# Altium PCB PCB1.PcbDoc
Units mil, origin at the board's own origin, x right, y up, seen from the top; angles counter-clockwise.
Board outline 2425 x 2095 mil, 2 copper layers (Top Layer, Bottom Layer); 21 components, 11 nets, 50 pads, 0 vias.
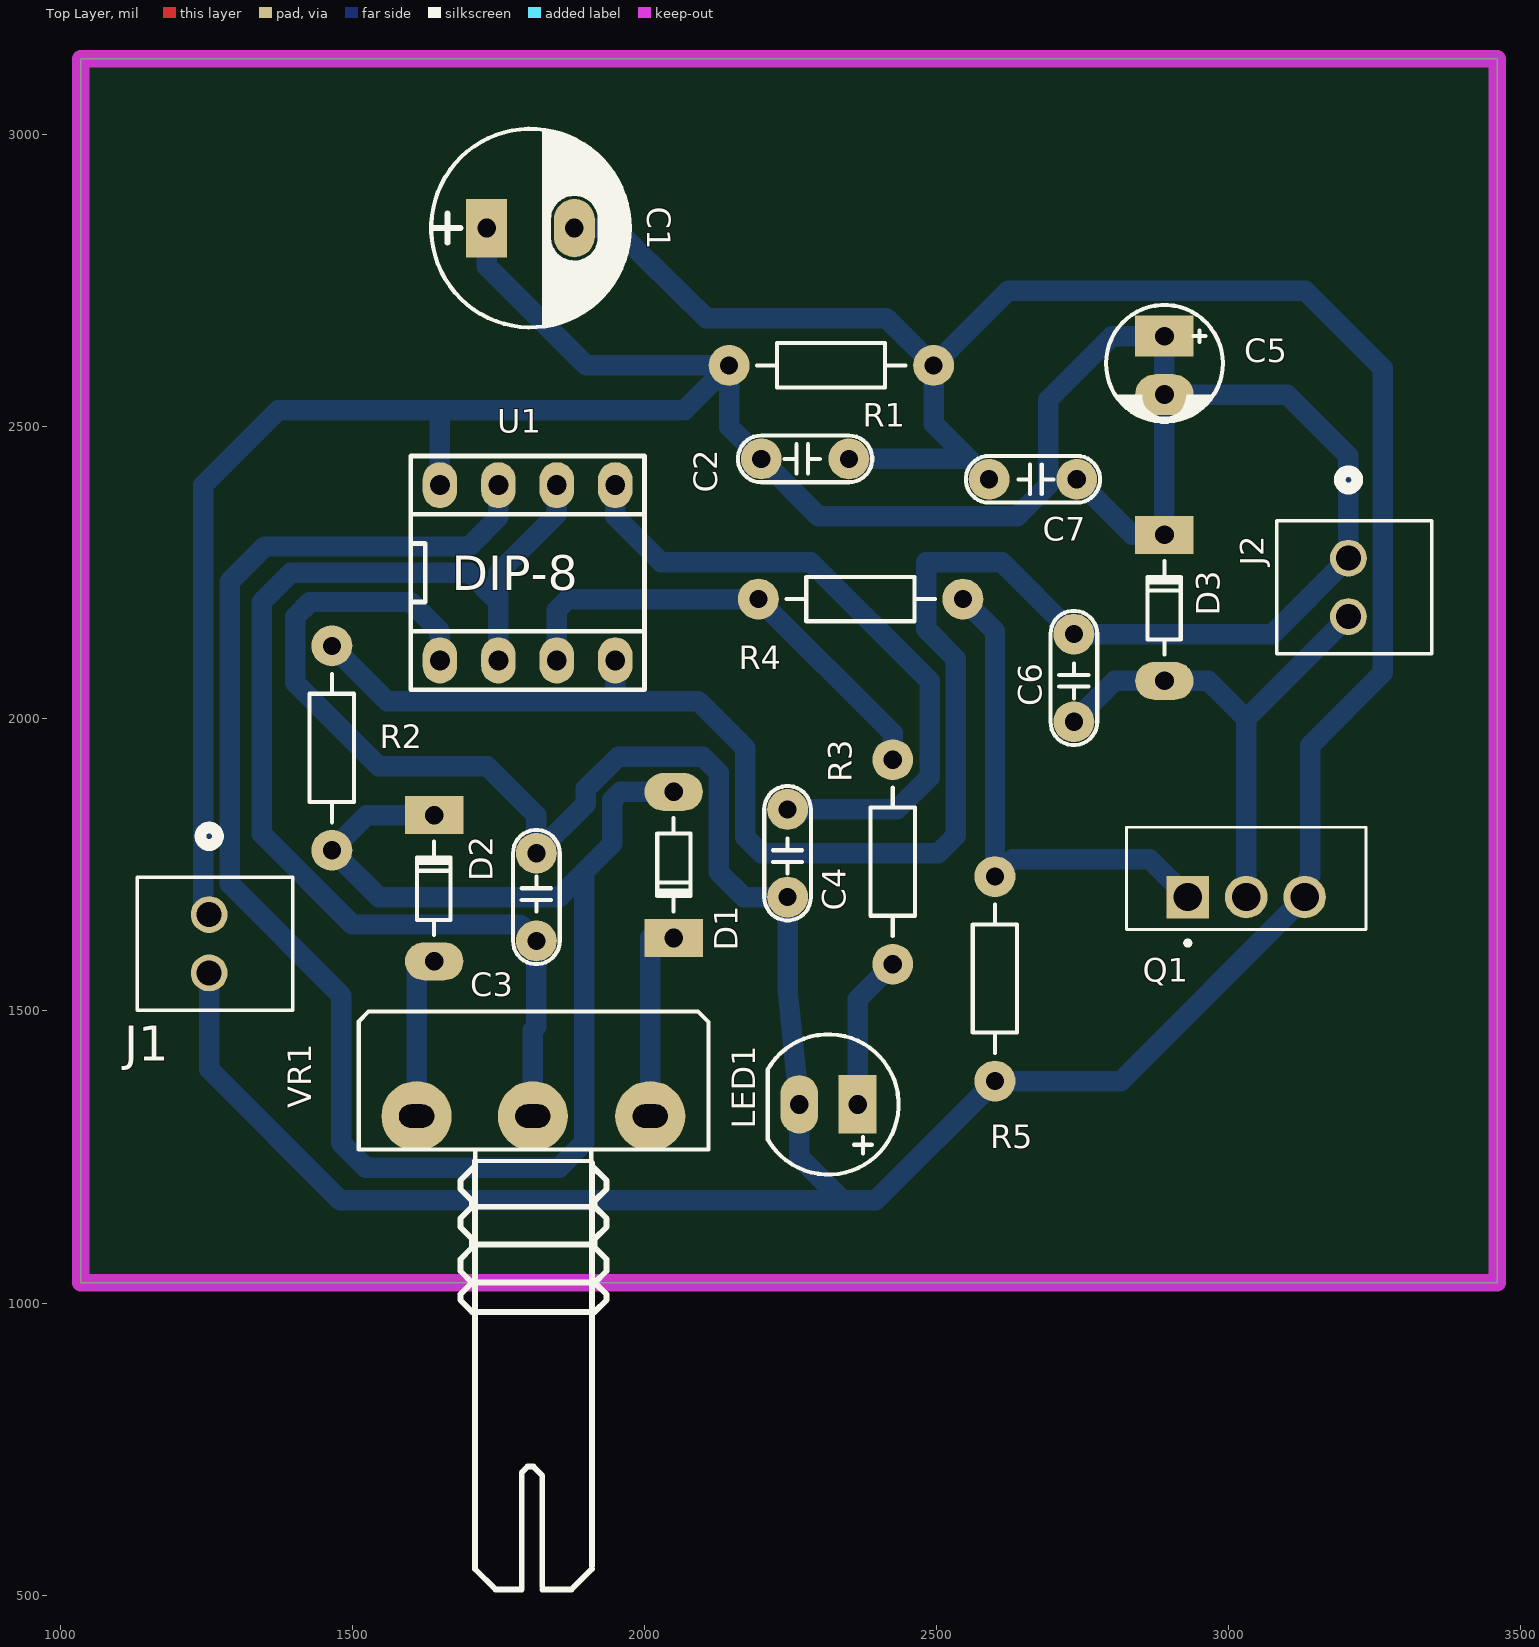
[diagram p0: Top Layer view]
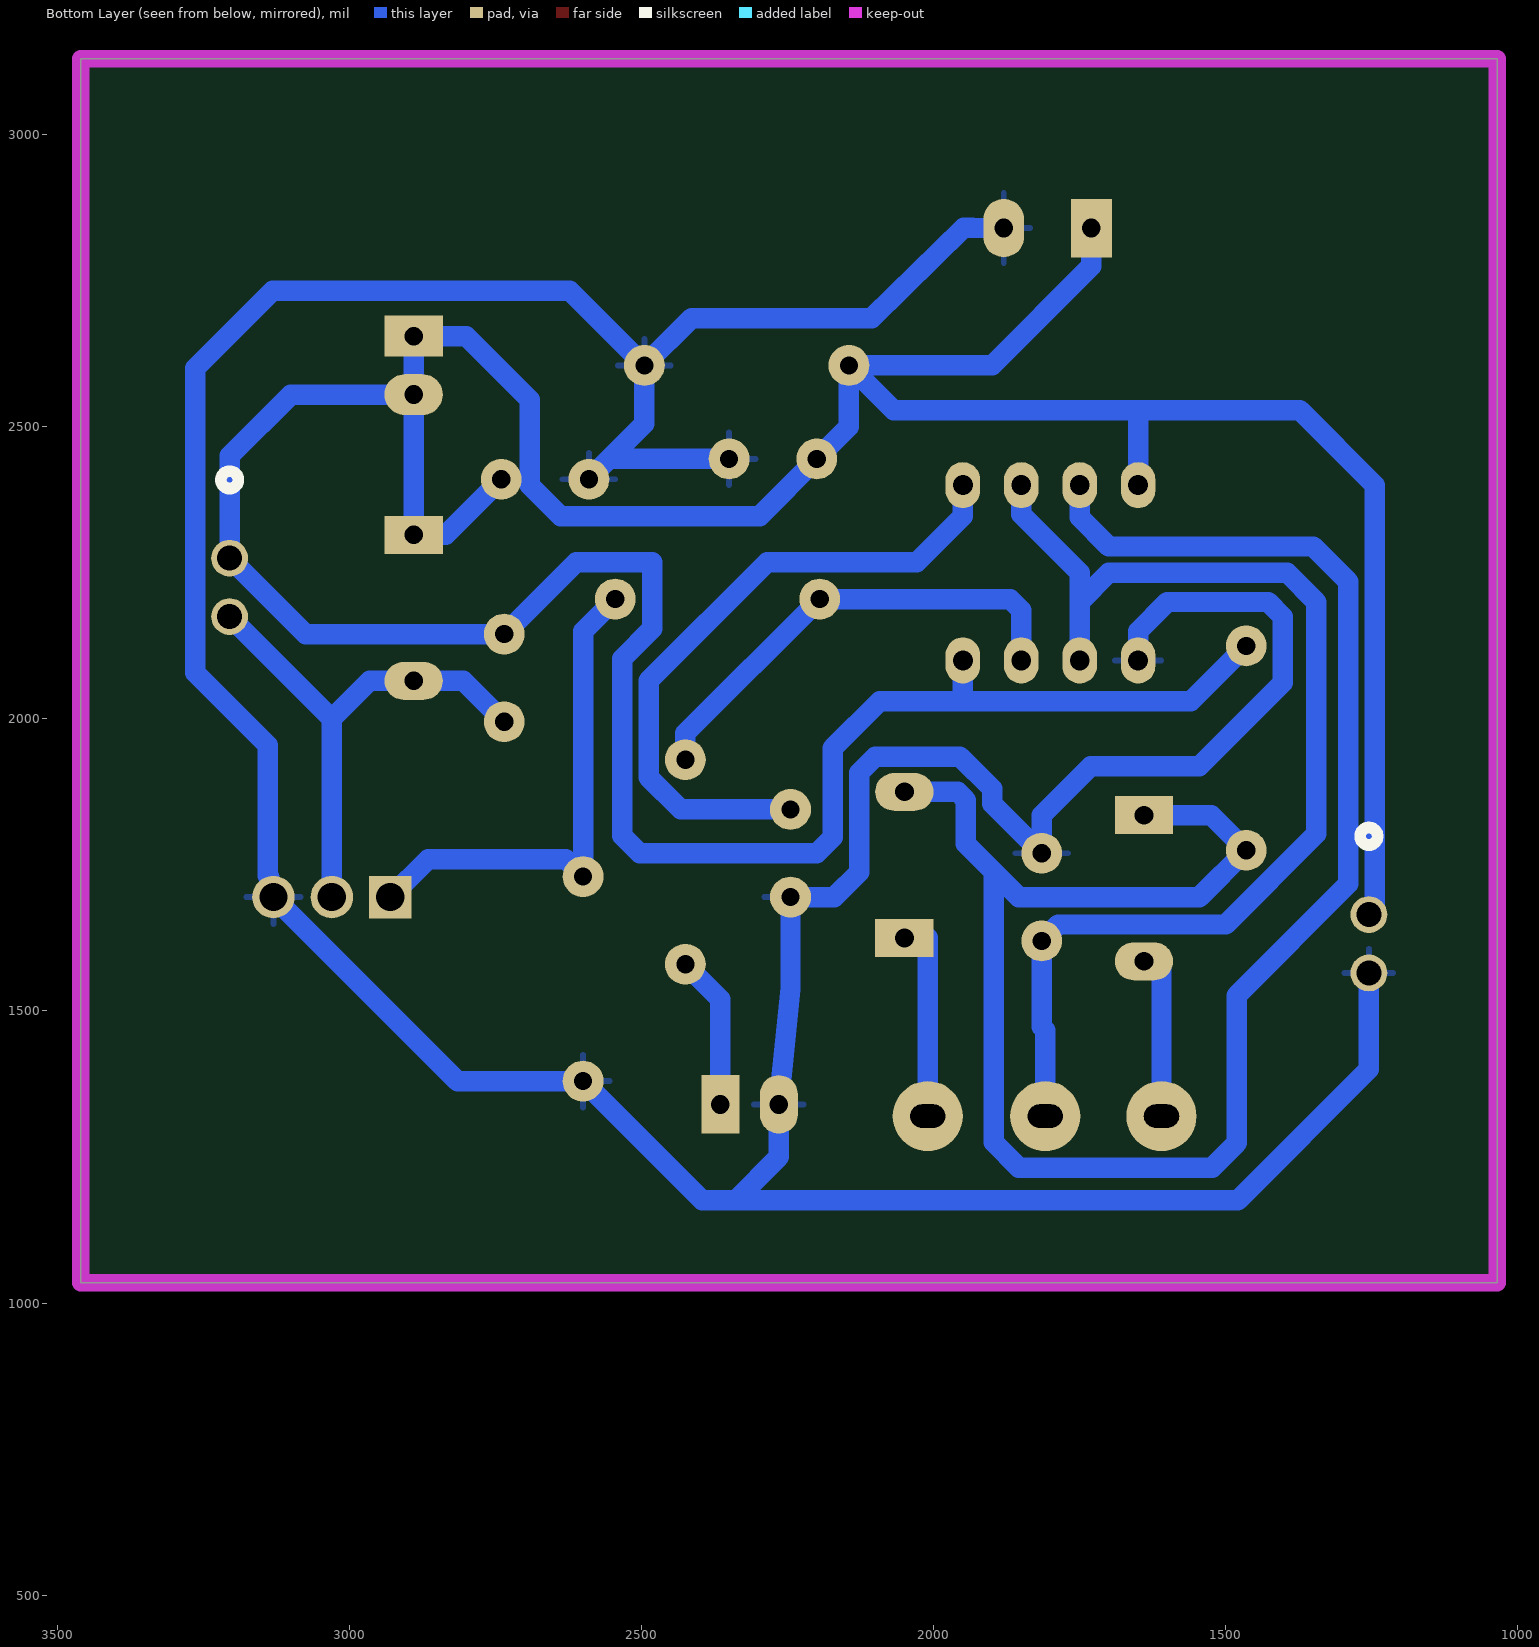
[diagram p1: Bottom Layer view, seen from below]
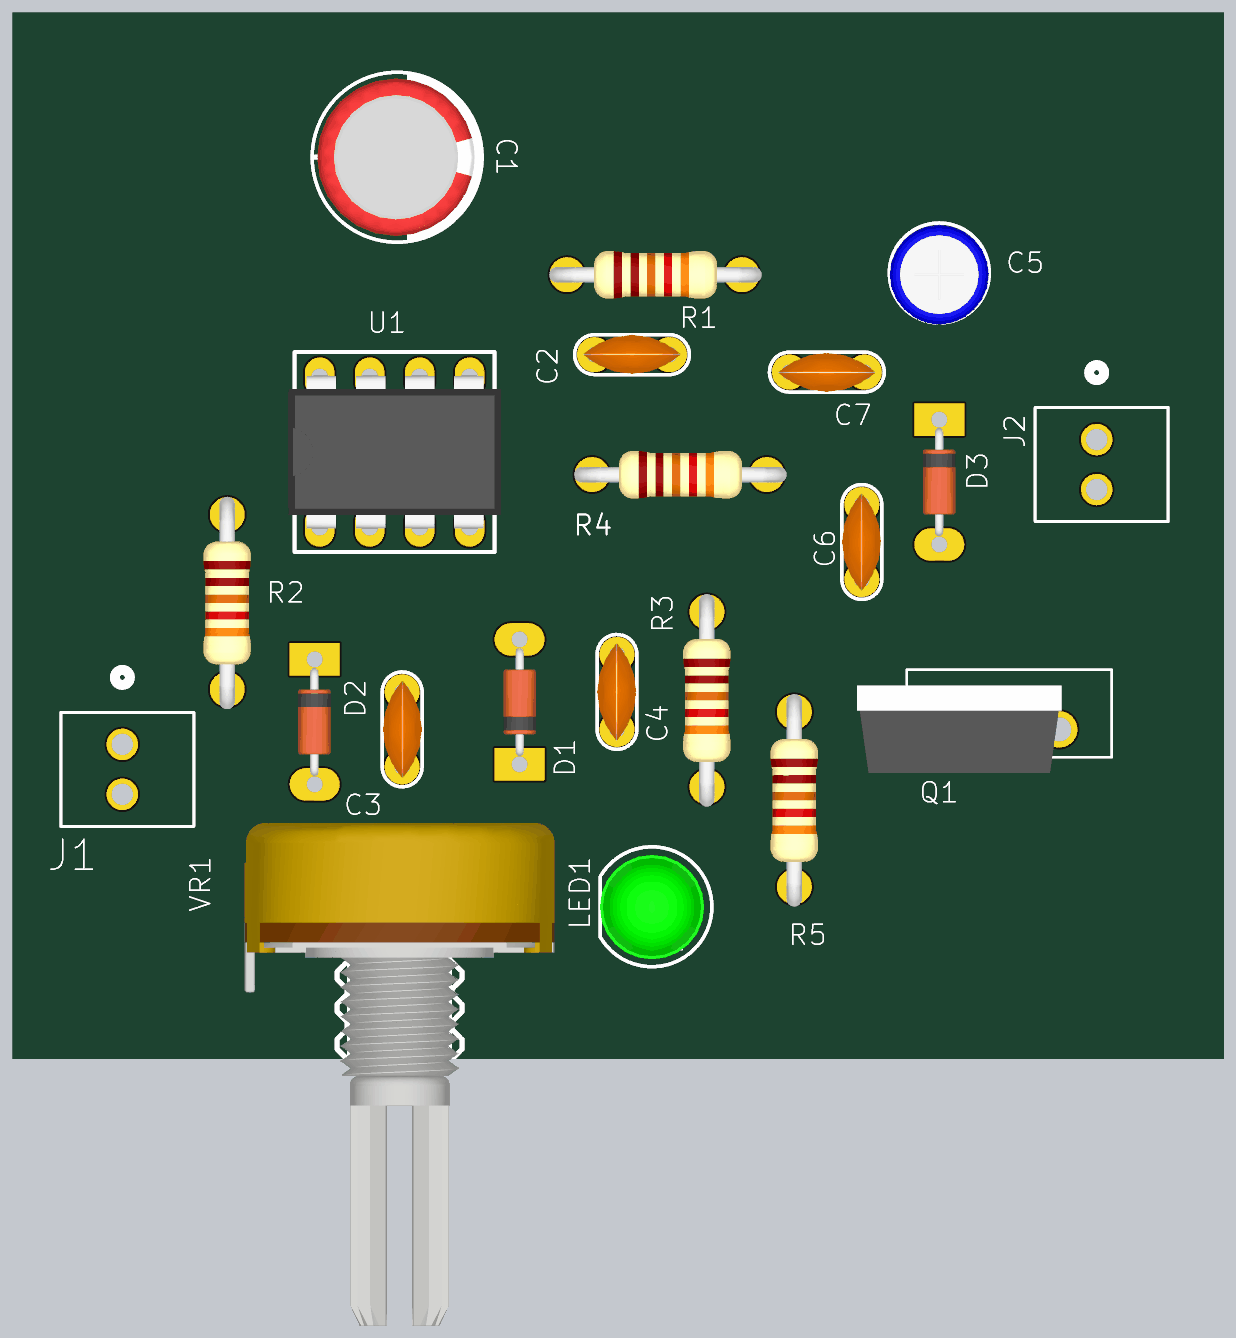
[diagram p2: 3D render of the assembled board from above, using the file's embedded part models]

## Layer stack, top to bottom
Top Solder: solder mask 0.4, Solder Resist, Dk 3.5
Top Layer: signal copper 1.4
Dielectric 1: dielectric 12.6, FR-4, Dk 4.8
Bottom Layer: signal copper 1.4
Bottom Solder: solder mask 0.4, Solder Resist, Dk 3.5

## Board outline
1035,1035 1035,3130 3460,3130 3460,1035

## Design rules (kind name [scope] priority, off if disabled: settings)
Clearance Clearance_1 [All] p1: gap=10 ignorepadtopadclearanceinfootprint=FALSE except(0: Arc-Hole Track-Hole SMDPad-Hole THPad-Hole Via-Hole Fill-Hole Poly-Hole Region-Hole Text-Hole)
Clearance [All] p2: gap=10 ignorepadtopadclearanceinfootprint=FALSE except(0: Arc-Hole Track-Hole SMDPad-Hole THPad-Hole Via-Hole Fill-Hole Poly-Hole Region-Hole Text-Hole; 30: Arc-Fill Arc-Poly Arc-Region Track-Fill Track-Poly Track-Region SMDPad-Fill SMDPad-Poly SMDPad-Region THPad-Fill THPad-Poly THPad-Region Via-Fill Via-Poly Via-Region Fill-Fill Fill-Poly Fill-Region Poly-Poly Poly-Region Region-Region)
PolygonConnect [All] p1: connectstyle=Relief reliefconductorwidth=10 reliefentries=4 polygonreliefangle="90 Angle" airgapwidth=10
RoutingLayers [All] p1: top layer_v5=FALSE bottom layer_v5=TRUE
RoutingVias [All] p1: holewidth=28 width=50 viastyle="Through Hole" minholewidth=28 minwidth=50 maxholewidth=28 maxwidth=50
SilkToSolderMaskClearance [IsPad] p1: minsilkscreentomaskgap=8 clearancetoexposedcopper=TRUE
SolderMaskExpansion [All] p1: expansion=4 istentingtop=FALSE
Width [All] p1: maxlimit=80 minlimit=28 preferedwidth=35
28 further rules are at their usual default settings.

## Components (designator, comment, footprint, x,y, rotation, side; value= is the part's Value field where it differs from the comment)
C1 "470uF/35V" CP1.5/3.4 1730,2840 r0 top value=100uF/35V/50V
C2 "100nF" CN1.5 2200,2445 r0 top value=33pF
C3 "100nF" CN1.5 1815,1770 r270 top value=33pF
C4 "100nF" CN1.5 2245,1695 r90 top value=33pF
C5 "10uF" CP1/2 2890,2655 r270 top value=10uF/50V
C6 "100nF" CN1.5 2735,1995 r90 top value=33pF
C7 "100nF" CN1.5 2740,2410 r180 top value=33pF
D1 "1N4148" D0.5A 2050,1750 r90 top
D2 "1N4148" D0.5A 1640,1710 r270 top
D3 "1N5819" D0.5A 2890,2190 r270 top value=1N4148
J1 "397730002" CONN_39773-0002_MOL 1255,1665 r270 top
J2 "397730002" CONN_39773-0002_MOL 3205,2275 r270 top
LED1 "LED5" "LED-5 GRe" 2365,1340 r180 top
Q1 "IRF3205" TO254P1041X444X2933-3 2930,1695 r0 top
R1 "10k" R1/4W 2495,2605 r180 top value="R1/4W - 1K"
R2 "1k" R1/4W 1465,1775 r90 top value="R1/4W - 1K"
R3 "1k" R1/4W 2425,1580 r90 top value="R1/4W - 1K"
R4 "470" R1/4W 2545,2205 r180 top value="R1/4W - 1K"
R5 "10k" R1/4W 2600,1380 r90 top value="R1/4W - 1K"
U1 "NE555" DIP8 1800,2250 r0 top
VR1 "30k" VOL_1 1610,1320 r0 top value="VR 10K"

## Footprints (in the part's own frame and the unit in brackets; to place one, negate y for a bottom-side part, rotate by r counter-clockwise, add the part's x,y. Pads: shape width x height; smd on the part's side, far side on the other; paste and mask are expansions set on the pad)
CN1.5 [mil]
  round 70 hole 31: 1(0,0) 2(150,0)
  silkscreen extent -40,-40 190,40, body extent -22,-39 172,40, height 254
CONN_39773-0002_MOL [mil]
  round 63 hole 43: 1(0,0) 2(100,0)
  silkscreen extent -149,-123 164,143
CP1.5/3.4 [mil] "Tu hoa 220->470uF,16V, 470uF/16V,25V"
  rect 70x100 hole 32: 1(0,0)
  oval 70x100 hole 32: 2(150,0)
  silkscreen extent -95,-170 245,170, body extent -85,-157 230,157, height 446
CP1/2 [mil] "Tu hoa < 22uF/16>50V"
  rect 70x100 hole 32: 1(0,0)
  oval 70x100 hole 32: 2(100,0)
  silkscreen extent -53,-100 146,100, body extent -49,-99 149,99, height 287
D0.5A [mil] "Diode muoi, W 80mil, L 300mil"
  oval 65x100 hole 32: 1(125,0)
  rect 65x100 hole 32: 2(-125,0)
  silkscreen extent -80,-30 80,28, body extent -108,-33 108,32, height 61
DIP8 [mm] "W.300/L.400"
  oval 1.5x2 hole 0.864: 1(-3.81,-3.81) 2(-1.27,-3.81) 3(1.27,-3.81) 4(3.81,-3.81) 5(3.81,3.81) 6(1.27,3.81) 7(-1.27,3.81) 8(-3.81,3.81)
  silkscreen extent -5.08,-5.08 5.08,5.08, body extent -5.4,-3.88 5.4,3.88, height 4.5
"LED-5 GRe" [mil] "LED 2 PIN, 5 ly , Only colour,pin to pin 100mil"
  rect 65x100 hole 32: 1(0,0)
  oval 65x100 hole 32: 2(100,0)
  silkscreen extent -70,-120 154,120, body extent -54,-104 154,105, height 337
R1/4W [mil] "R 1/4W, 2 Pin, 350mil"
  round 70 hole 31: 1(0,0) 2(350,0)
  silkscreen extent 48,-38 302,38, body extent -40,-47 386,47, height 111
TO254P1041X444X2933-3 [mm]
  rect 1.85x1.85 / inner round 1.85 / far side rect 1.85x1.85 hole 1.23: 1(0,0)
  round 1.85 hole 1.23: 2(2.54,0) 3(5.08,0)
  silkscreen extent -2.67,-2.1 7.75,3.03, body extent -5.21,-2.22 5.21,2.22, height 19.3
VOL_1 [mil]
  round 120 hole 40 slot 60 at 0 deg: 1(0,0) 2(199,0) 3(400,0)
  silkscreen extent -99,-810 500,179, body extent -110,-818 510,188, height 839

## Part data
C1: library part CP3, "Cap 100uF/35V - 470uF/16V", Description 1="1000uF/6,3V - 470uF/16V - 330uF - 25V", Description 2="220uF/35V - 100uF/50V - 63V - 4,7uF/200V", Description 3="22uF => 33uF100V - 3,3uF => 4,7uF/250V", Description 4="2,2uF =>3,3uF/350 - 2,2uF/400V - 1uF/450V"
C2 C3 C4 C6 C7: library part CN
C5: library part CP1, "Cap P  0,1uF < 22uF , 16 - 50V", Description 1="10 => 220uF/6,3V/10V - 10uF => 100uF/16V", Description 2="0,1uF => 33uF/50V - 10uF => 22uF/63V", Description 3="0,47uF => 10uF/100V"
D1 D2 D3: library part D0.5A, "D0.5A"
J1 J2: "2 Position Wire to Board Terminal Block Horizontal with Board 0.100 (2.54mm) Through Hole", Package=None, Check_prices=https://www.snapeda.com/parts/397730002/Molex/view-part/?ref=eda, MF=Molex, MP=397730002, SnapEDA_Link=https://www.snapeda.com/parts/397730002/Molex/view-part/?ref=snap
LED1: library part "LED 5mm", "LED 5mm"
Q1: "N-Channel 55V 110A (Tc) 200W (Tc) Through Hole TO-220AB", Package="TO-220 Infineon", Check_prices=https://www.snapeda.com/parts/IRF3205/Infineon+Technologies/view-part/?ref=eda, MF="Infineon Technologies", MP=IRF3205, SnapEDA_Link=https://www.snapeda.com/parts/IRF3205/Infineon+Technologies/view-part/?ref=snap
R1 R2 R3 R4 R5: library part R1/4W, "Resistor 1/4W"
U1: "TIMER IC", Current=200mA, Frequency=500kHz, Manufacturer=STMicroelectronics, Manufacturer Part Number=NE555DT, Operating Temperature="0°C ~ 70°C", Package / Case="8-SOIC (3.9mm Width)", Supplier Part Number=497-1962-2-ND, Voltage - Supply="4.5 V ~ 16 V", Category="Integrated Circuits (ICs)", Count=-, Packaging="Tape & Reel (TR)", RoHS="RoHS Compliant", Supplier=Digi-Key, Supplier 1=Digi-Key, Supplier Part Number 1=497-1962-2-ND, Type="555 Type, Timer/Oscillator (Single)"
VR1: library part "Var Resitor", "Var Resistor"

## Nets (pads, with @x,y where several pads share a name; then routed paths per layer and width w, separated by ;. In a path a pad name is that pad's centre, name@x,y a point inside that pad or via, vN(x,y) a via of type N, cw(c..) or ccw(c..) an arc to the next point about the centre after c; other vN are vias at no path point)
GND: C1.2 C2.2 C3.1 C4.1 C7.2 J1.2 LED1.2 Q1.3 R1.1 R5.1 U1.1 | length 7612.2
  Bottom Layer w35: J1.2 1255,1400 1479,1176 2339,1176 ; U1.1 1650,2150 1600,2200 1427.5,2200 1402.5,2175 1402.5,2062 1545.5,1919 1731,1919 1815,1835 C3.1 1899.92,1854.92 1899.92,1880 1954.92,1935 2100,1935 2127.5,1907.5 2127.5,1737.5 2170,1695 C4.1 2245,1538 LED1.2 2265,1250 2339,1176 ; C1.2 1933.84,2840.52 1934,2840.53 1948.48,2840.53 2106.05,2686 2414,2686 R1.1 ; C2.2 2555,2445 ; C7.2 2555,2445 ; 2339,1176 2396,1176 R5.1 2815,1380 Q1.3 3137.24,1702.24 3137.24,1728.99 3140,1731.75 3140,1955 3264,2079 3264,2600 3131,2733 2623,2733 R1.1 ; R1.1 2495,2505 2555,2445
NetC1_1: C1.1 C2.1 C5.1 C5.2 C6.2 C7.1 D3.2 J1.1 J2.1 R1.2 R2.2 U1.4 U1.8 | length 7301.4
  Bottom Layer w35: J1.1 1245,1665 1245,2400 1373,2528 1650,2528 ; R2.2 1560,2030 1950,2030 ; U1.8 1650,2528 ; C1.1 1730,2775 1900,2605 R1.2 ; U1.4 1950,2030 ; C7.1 2835,2315 D3.2 C5.2 ; 1650,2528 2068,2528 R1.2 ; 1950,2030 2092.5,2030 2172.5,1950 2172.5,1797.5 2200,1770 2503,1770 2533,1800 2533,2103 2482,2154 2482,2268 2612,2268 C6.2 3075,2145 J2.1 3205,2450 3100,2555 C5.2 ; R1.2 2145,2500 C2.1 2298,2347 2638,2347 2691,2400 2691,2546 2800,2655 C5.1 C5.2
NetC3_2: C3.2 U1.2 U1.6 VR1.2 | length 2033.1
  Bottom Layer w35: U1.2 1750,2200 ; VR1.2 1809,1467 1815,1473 C3.2 1787,1648 1500,1648 1345,1803 1345,2200 1395,2250 1700,2250 1750,2200 ; U1.6 1850,2350 1750,2250 1750,2200
NetC4_2: C4.2 U1.5 | length 1138.6
  Bottom Layer w35: U1.5 1950,2347 2029,2268 2285,2268 2488,2065 2488,1900 2433,1845 C4.2
NetC6_1: C6.1 D3.1 J2.2 Q1.2 | length 903.4
  Bottom Layer w35: C6.1 2805,2065 D3.1 2965,2065 3030,2000 ; Q1.2 3030,2000 ; J2.2 3030,2000
NetD1_1: D1.1 D2.2 R2.1 U1.7 | length 3451.4
  Bottom Layer w35: D2.2 1525,1835 R2.1 1545,1695 1854,1695 1897,1738 ; U1.7 1750,2345 1700,2295 1350,2295 1290,2235 1290,1717.5 1481,1526.5 1481,1274 1523,1232 1854,1232 1897,1275 1897,1738 ; D1.1 1959,1875 1945,1861 1945,1786 1897,1738
NetD1_2: D1.2 VR1.3 | length 345
  Bottom Layer w35: VR1.3 2010,1625 D1.2
NetD2_1: D2.1 VR1.1 | length 295
  Bottom Layer w35: VR1.1 1610,1585 D2.1
NetLED1_1: LED1.1 R3.1 | length 264.9
  Bottom Layer w35: LED1.1 2365,1520 R3.1
NetQ1_1: Q1.1 R4.1 R5.2 | length 867.1
  Bottom Layer w35: R4.1 2600,2150 R5.2 2630,1760 2865,1760 Q1.1
NetR3_2: R3.2 R4.2 U1.3 | length 809.1
  Bottom Layer w35: U1.3 1850,2186 1869,2205 R4.2 2425,1975 R3.2

## Polygon pours and split planes (outlines as drawn)
GND on Bottom Layer "GND_L02_P000" (none, remove dead copper, pour order 0): 1035,3130 3450,3130 3450,1040 3445,1035 1040,1035

## Keep-outs
Keep-Out Layer:
  the board outline again, w30

## Other copper
Bottom Layer:
  pour cut-out: 1130,3030 1480,3030 1497.39,3012.61 1492.43,2675 1155,2675 1130,2700

## Silkscreen, mask and mechanical layers (free items; w line width, h text height)
Mechanical 1:
  text "Duy Son / Thanh Hai" at 1155,2685 h60

## Text inside footprints (layer, text, board x,y; h text height)
U1: Top Overlay "DIP-8" at 1670,2220 h59.05